# EAGLE board Mighty Snaget-Maimu (1) (EAGLE 9.7.0)

Size 228.4 x 111.3 mm. Coordinates in mm from the lower left corner, seen from the top.
Outline: 0,0 228.4,0 228.4,111.3 0,111.3 0,0
Copper layers (1*16): Top 0.035mm / dielectric 1.5mm / Bottom 0.035mm
Design rules "default": minimum track width 6mil, minimum drill 0.35mm, track to track 6mil, track to pad 6mil, pad to pad 6mil, via to via 6mil, smd to smd 6mil, copper to edge 40mil, drill to drill 6mil, minimum pad ring 10mil, minimum via ring 8mil, stop-mask expansion 4mil, vias tented up to drill 0mil, thermal gap 10mil

## Footprints (pad centres in the part's own frame; a part is rotated, then mirrored left to right if it is on the bottom)
BATTERY-GENERIC = drill 1.118 pad 3.15 octagon: + 2.54,0; - -2.54,0
28015 = drill 1.016 long: 1 -2.54,0; 2 0,0; 3 2.54,0
SG90 = drill 1.016 long: 1 -2.54,0; 2 0,0; 3 2.54,0
ARDUINO-UNO-R3-SHIELD = drill 1.016 pad 1.88: 3.3V 24.13,-2.54; 5V 24.13,0; A0 24.13,12.7; A1 24.13,15.24; A2 24.13,17.78; A3 24.13,20.32; A4 24.13,22.86; A5 24.13,25.4; AREF -24.13,-13.97; D2 -24.13,20.32; D3 -24.13,17.78; D4 -24.13,15.24; D5 -24.13,12.7; D6 -24.13,10.16; D7 -24.13,7.62; D8 -24.13,3.81; D9 -24.13,1.27; D10 -24.13,-1.27; D11 -24.13,-3.81; D12 -24.13,-6.35; D13 -24.13,-8.89; GND@0 24.13,2.54; GND@1 24.13,5.08; GND@2 -24.13,-11.43; IOREF 24.13,-7.62; NC 24.13,-10.16; RES 24.13,-5.08; RX -24.13,25.4; SCL -24.13,-19.05; SDA -24.13,-16.51; TX -24.13,22.86; VIN 24.13,7.62

## Placement (x,y rotation side)
BAT1  9V  [BATTERY-GENERIC]  8.26,103.05 180 top
PING1  DISTANCE-SENSOR-3PIN  [28015]  150.94,35.95 270 top
SERVOEE  SERVOSG90  [SG90]  221.41,47.22 0 top
U11  ARDUINO-UNO-R3-SHIELD  [ARDUINO-UNO-R3-SHIELD]  117.77,29.84 270 top

## Library data of the parts
BAT1 PING1 SERVOEE U11 = Tinkercad

## Nets
BAT1+: BAT1.+ U11.VIN
BAT1-: BAT1.- PING1.1 SERVOEE.1 U11.GND@0 U11.GND@1 U11.GND@2
U11_5V: PING1.2 SERVOEE.2 U11.5V
U11_D7: PING1.3 U11.D7
U11_D9: SERVOEE.3 U11.D9

## Tracks (layer width: path | path; a pad name or v marks a point on that pad's centre or on a via)
BAT1+  (1 unrouted)
BAT1-  (5 unrouted)
U11_5V  (2 unrouted)
U11_D7  (1 unrouted)
U11_D9  (1 unrouted)